# Altium PCB EDTENS.PcbDoc
Units mil, origin at the board's own origin, x right, y up, seen from the top; angles counter-clockwise.
Board outline 6000 x 4000 mil, 2 copper layers (Top Layer, Bottom Layer); 40 components, 18 nets, 96 pads, 0 vias.
Unrouted connection lines stored in the file: 78.
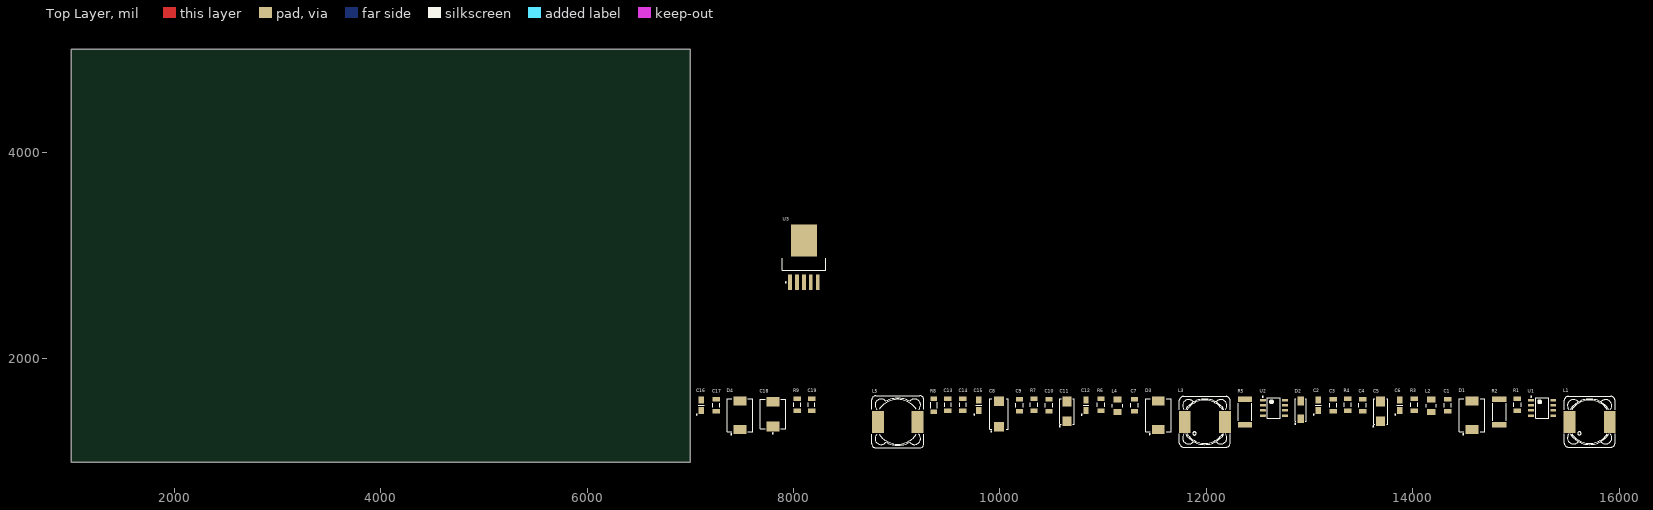
[diagram p0: Top Layer view]
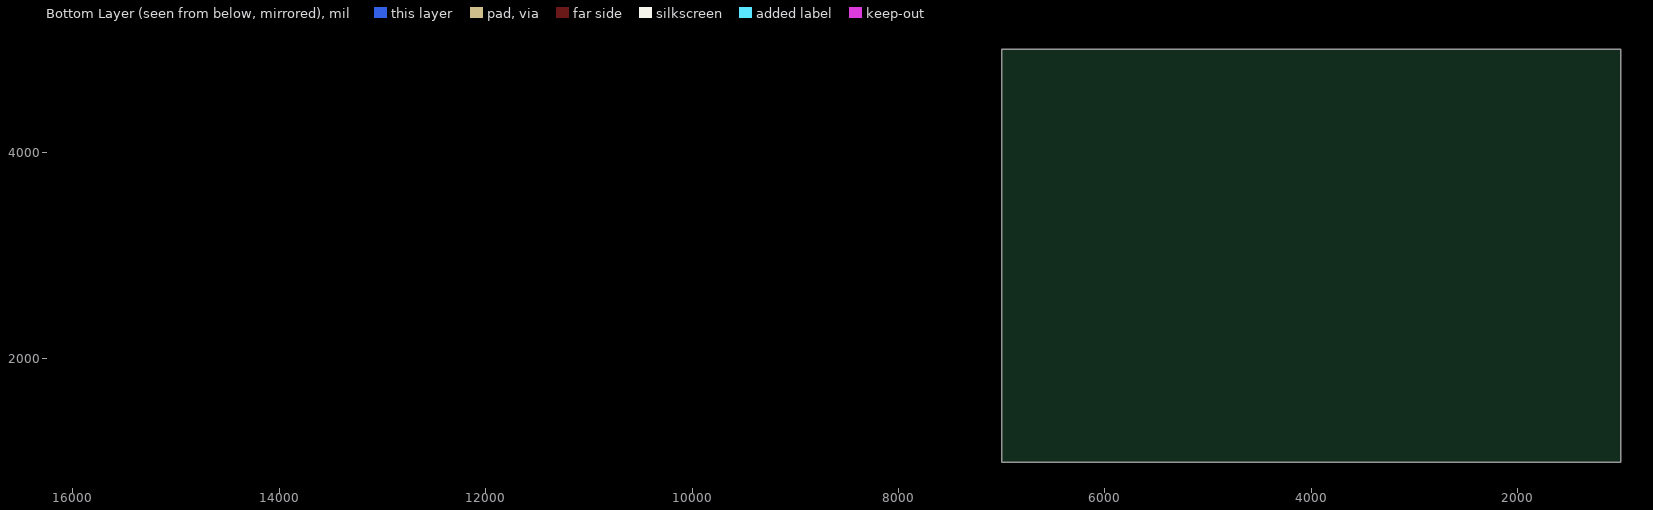
[diagram p1: Bottom Layer view, seen from below]

## Layer stack, top to bottom
Top Solder: solder mask 0.4, Solder Resist, Dk 3.5
Top Layer: signal copper 1.4
Dielectric 1: dielectric 12.6, FR-4, Dk 4.8
Bottom Layer: signal copper 1.4
Bottom Solder: solder mask 0.4, Solder Resist, Dk 3.5

## Board outline
1000,1000 7000,1000 7000,5000 1000,5000

## Design rules (kind name [scope] priority, off if disabled: settings)
Clearance [All] p1: gap=10 ignorepadtopadclearanceinfootprint=FALSE except(0: Arc-Hole Track-Hole SMDPad-Hole THPad-Hole Via-Hole Fill-Hole Poly-Hole Region-Hole Text-Hole)
PolygonConnect [All] p1: connectstyle=Relief reliefconductorwidth=10 reliefentries=4 polygonreliefangle="90 Angle" airgapwidth=10
RoomDefinition EDTENS [InComponentClass('EDTENS')] p1: confinementstyle=ConfineOut formatcopy=TRUE lockcomponents=FALSE outline 7045,990 15985,990 15985,1720 7045,1720
RoutingVias [All] p1: holewidth=28 width=50 viastyle="Through Hole" minholewidth=28 minwidth=50 maxholewidth=28 maxwidth=50
SolderMaskExpansion [All] p1: expansion=4 istentingtop=FALSE
Width [All] p1: maxlimit=10 minlimit=10 preferedwidth=10
30 further rules are at their usual default settings.

## Components (designator, comment, footprint, x,y, rotation, side; value= is the part's Value field where it differs from the comment)
C1 "1.5nF" CAPC3216X140N 14340,1550 r90 top
C2 "2.2uF" CAPMP3216X180N 13085,1550 r90 top
C3 "1uF" CAPC3216X140N 13230,1550 r90 top
C4 "330pF" CAPC3216X140N 13515,1550 r90 top
C5 "1uF" CAPMP6032X280N 13690,1490 r90 top
C6 "1uF" CAPMP3216X180N 13875,1550 r90 top
C7 "1.5nF" CAPC3216X140N 11305,1550 r90 top
C8 "220uF" CAPMP7343X430N 9990,1465 r90 top
C9 "1uF" CAPC3216X140N 10190,1550 r90 top
C10 "330pF" CAPC3216X140N 10475,1550 r90 top
C11 "1uF" CAPMP6032X280N 10650,1490 r90 top
C12 "1uF" CAPMP3216X180N 10835,1550 r90 top
C13 "100nF" CAPC3216X180N 9495,1555 r90 top
C14 "100nF" CAPC3216X180N 9640,1555 r90 top
C15 "2.2uF" CAPMP3216X180N 9795,1550 r90 top
C16 "2.2uF" CAPMP3216X180N 7105,1550 r90 top
C17 "1uF" CAPC3216X140N 7250,1550 r90 top
C18 "220uF" CAPMP7362X380N 7800,1465 r90 top
C19 "100nF" CAPC3216X180N 8175,1555 r90 top
D1 "SS34" DIOM7959X265N 14575,1455 r90 top
D2 "BZG03C39" DIOM5326X230N 12915,1505 r90 top
D3 "SS34" DIOM7959X265N 11535,1455 r90 top
D4 "SS34" DIOM7959X265N 7480,1455 r90 top
L1 "180uH" IND_WURTH_WE-PD_XXL 15715,1390 r0 top
L2 "1uH" INDM3225X210N 14180,1545 r90 top
L3 "100uH" IND_WURTH_WE-PD_XXL 11985,1390 r0 top
L4 "1uH" INDM3225X210N 11140,1545 r90 top
L5 "33uH" IND_BOURNS_PM127SH 9010,1390 r0 top
R1 "180" RESC3216X65N 15015,1555 r90 top
R2 "0R22" RESC6532X80N 14840,1485 r90 top
R3 "47k" RESC3216X65N 14015,1555 r90 top
R4 "2k2" RESC3216X65N 13370,1555 r90 top
R5 "0R24" RESC6532X80N 12375,1485 r90 top
R6 "953R" RESC3216X65N 10980,1555 r90 top
R7 "8K2" RESC3216X65N 10330,1555 r90 top value=8k2
R8 "50k" RES_SEI_HVC1206 9360,1550 r90 top
R9 "1k" RESC3216X65N 8035,1555 r90 top
U1 "MC33063AD" D0008A_N 15255,1525 r0 top
U2 "MC33063AD" D0008A_N 12655,1525 r0 top
U3 "LM2596SX-ADJ/NOPB" KTT0005B_L 8100,2985 r90 top

## Footprints (in the part's own frame and the unit in brackets; to place one, negate y for a bottom-side part, rotate by r counter-clockwise, add the part's x,y. Pads: shape width x height; smd on the part's side, far side on the other; paste and mask are expansions set on the pad)
CAPC3216X140N [mm] "Chip Capacitor, Body 3.2x1.6mm, IPC Medium Density"
  rect 1.15x1.8 smd: 1(-1.5,0) 2(1.5,0)
  silkscreen extent -0.5,-0.9 0.5,0.9, body extent -1.7,-0.9 1.7,0.9, height 1.4
CAPC3216X180N [mm] "Chip Capacitor, Body 3.2x1.6mm, IPC Medium Density"
  rect 1.15x1.8 smd: 1(-1.5,0) 2(1.5,0)
  silkscreen extent -0.55,-0.8 0.55,0.8, body extent -1.7,-0.9 1.7,0.9, height 1.8
CAPMP3216X180N [mm] "Capacitor, Polarized, Molded  Body 3.2x1.6mm, IPC Medium Density"
  rect 1.8x1.25 smd: 1(-1.3,0) 2(1.3,0)
  silkscreen extent -2.4,-0.7 0,1.25, body extent -1.7,-0.9 1.7,0.9, height 1.6
CAPMP6032X280N [mm] "Capacitor, Polarized, Molded  Body 6.0x3.2mm, IPC Medium Density"
  rect 2.35x2.25 smd: 1(-2.45,0) 2(2.45,0)
  silkscreen extent -3.8,-1.75 3.15,1.9, body extent -3.15,-1.75 3.15,1.75, height 2.8
CAPMP7343X430N [mm] "Capacitor, Polarized, Molded  Body 7.3x4.3mm, IPC Medium Density"
  rect 2.35x2.45 smd: 1(-3.1,0) 2(3.1,0)
  silkscreen extent -4.42,-2.3 3.8,2.3, body extent -3.8,-2.3 3.8,2.3, height 4.3
CAPMP7362X380N [mm] "Molded Capacitor, 2-Leads, Body 7.3x6.2mm, IPC Medium Density"
  rect 2.4x3.2 smd: 1(-3.05,0) 2(3.05,0)
  silkscreen extent -4.87,-3.1 3.65,3.1, body extent -3.75,-3.15 3.75,3.15, height 3.8
D0008A_N [mm] "SOIC, 8-Leads, Body 5x4mm, Pitch 1.27mm, IPC Medium Density"
  rrect17% 1.45x0.6 smd: 1(-2.725,1.905) 2(-2.725,0.635) 3(-2.725,-0.635) 4(-2.725,-1.905) 5(2.725,-1.905) 6(2.725,-0.635) 7(2.725,0.635) 8(2.725,1.905)
  silkscreen extent -2.85,-2.5 1.6,2.88, body extent -3,-2.45 3,2.45, height 1.63
DIOM5326X230N [mm] "DO-214-AC/SMA Molded Diode, Body 5.3x2.6mm, IPC Medium Density"
  rect 2.1x1.55 smd: 1(-2.2,0) 2(2.2,0)
  silkscreen extent -3.52,-1.4 2.75,1.45, body extent -2.75,-1.4 2.75,1.4, height 2.3
DIOM7959X265N [mm] "DO-214-AB/SMC Molded Diode, Body 7.9x5.9mm, IPC Medium Density"
  rect 2.2x3.15 smd: 1(-3.5,0) 2(3.5,0)
  silkscreen extent -4.82,-3.15 4.05,3.15, body extent -4.06,-3.11 4.07,3.11, height 2.65
IND_BOURNS_PM127SH [mm] "SMD Inductor Body Width 12.5mm Body Lenght 12.5mm Height 8mm"
  rect 2.9x5.4 smd: 1(-4.85,0) 2(4.85,0)
  silkscreen extent -6.4,-6.4 6.4,6.4, body extent -6.4,-6.4 6.4,6.4, height 8
IND_WURTH_WE-PD_XXL [mm] "Power-Choke Inductor, Body 12x12mm, WURTH WE-PD Serie Type XXL"
  rect 2.9x5.4 smd: 1(-4.95,0) 2(4.95,0)
  silkscreen extent -6.25,-6.25 6.25,6.25, body extent -6.25,-6.25 6.25,6.25, height 10
INDM3225X210N [mm] "Inductor, Molded Body; 3.20mm L X 2.50mm W, IPC Medium Density"
  rect 1.5x2.05 smd: 1(-1.5,0) 2(1.5,0)
  silkscreen extent -0.4,-1.25 0.4,1.25, body extent -1.7,-1.35 1.7,1.35, height 2.1
KTT0005B_L [mm] "DPAK, 5-Leads, Body 10.65x9.65mm, Pitch 1.7mm, IPC High Density"
  rrect11% 3.85x0.95 smd: 1(-6.2,3.4) 2(-6.2,1.7) 3(-6.2,0) 4(-6.2,-1.7) 5(-6.2,-3.4)
  rrect2% 7.9x6.4 smd: 6(4.15,0)
  silkscreen extent -6.32,-5.35 -0.2,5.35, body extent -3.2,-5.32 6.45,5.33, height 4.83
RES_SEI_HVC1206 [mm] "Chip Resistor, EIA 1206, Metric 3216, Body 3.2x1.6mm"
  rect 1x1.6 smd: 1(-1.6,0) 2(1.6,0)
  silkscreen extent -0.75,-0.8 0.75,0.8, body extent -1.6,-0.8 1.6,0.8, height 0.76
RESC3216X65N [mm] "Chip Resistor, EIA 1206, Metric 3216, Body 3.2x1.6mm, IPC Medium Density"
  rect 1.15x1.8 smd: 1(-1.45,0) 2(1.45,0)
  silkscreen extent -0.5,-0.9 0.5,0.9, body extent -1.67,-0.87 1.68,0.88, height 0.65
RESC6532X80N [mm] "Resistor, Chip; 6.5mm L X 3.25mm W X 0.80mm H, IPC Medium Density"
  rect 1.3x3.5 smd: 1(-3.15,0) 2(3.15,0)
  silkscreen extent -2.15,-1.65 2.15,1.65, body extent -3.25,-1.62 3.25,1.63, height 0.8

## Part data
C1 C7: library part CC1206_1.5NF_50V_5%_NP0, "Non-polarised capacitor", Case=1206, Manufacturer=GENERIC, Manufacturer1 ComponentHeight=1.25mm, Manufacturer1 Example=PHYCOMP, Manufacturer1 Part Number="2238 863 15152", Tolerance=±5%, Voltage=50V, Author="CERN DEM JLC", Component Type=Standard, CreateDate=12/3/2007, HelpURL=\\cern.ch\dfs\Applications\Altium\Datasheets\CC1206_NP0_PHYCOMP.pdf, LatestRevisionDate=12/3/2007, Manufacturer Part Number=CC1206_1.5NF_50V_5%_NP0, Mounted=Yes, Part Description="SMD Multilayer Chip Ceramic Capacitor", Part Number=CC1206_1.5NF_50V_5%_NP0, Pin Count=2, Sense=No, SMD=Yes, Socket=No, Status=Preferred, TC=C0G/NP0
C2 C15 C16: library part CTE3216-18_2.2UF_25V_10%, "Polarised capacitor", Case=A, Manufacturer=GENERIC, Manufacturer1 ComponentHeight=1.8mm, Manufacturer1 Example=AVX, Manufacturer1 Part Number=TAJA225K025R, Tolerance=±10%, Voltage=25V, Author="CERN DEM JLC", Component Type=Standard, CreateDate=5/26/2008, HelpURL=\\cern.ch\dfs\Applications\Altium\Datasheets\CTE_AVX_TAJ.pdf, LatestRevisionDate=5/26/2008, Manufacturer Part Number=CTE3216-18_2.2UF_25V_10%, Mounted=Yes, Part Description="Solid Tantalum Chip Capacitor", Part Number=CTE3216-18_2.2UF_25V_10%, Pin Count=2, Sense=No, SMD=Yes, Socket=No, Status=Preferred
C3 C9 C17: library part CC1206_1UF_100V_10%_X7R, "Non-polarised capacitor", Case=1206, Manufacturer=GENERIC, Manufacturer1 ComponentHeight=1.8mm, Manufacturer1 Example=KEMET, Manufacturer1 Part Number=C1206C105K1RAC, Tolerance=±10%, Voltage=100V, Author="CERN DEM BC", Component Type=Standard, CreateDate=1/24/2020, HelpURL=\\cern.ch\dfs\Applications\Altium\Datasheets\CC1206_X7R_KEMET_OPENMODE.pdf, LatestRevisionDate=1/24/2020, Manufacturer Part Number=CC1206_1UF_100V_10%_X7R, Mounted=Yes, Part Description="SMD Multilayer Chip Ceramic Capacitor", Part Number=CC1206_1UF_100V_10%_X7R, Pin Count=2, Sense=No, SMD=Yes, Socket=No, Status=Preferred, TC=X7R
C4 C10: library part CC1206_330PF_100V_10%_NP0, "Non-polarised capacitor", Case=1206, Manufacturer=GENERIC, Manufacturer1 ComponentHeight=0.94mm, Manufacturer1 Example=AVX, Manufacturer1 Part Number=12061A331KAT2A, Tolerance=±10%, Voltage=100V, Author="CERN DEM JLC", Component Type=Standard, CreateDate=8/24/2009, HelpURL=\\cern.ch\dfs\Applications\Altium\Datasheets\CC1206_NP0_AVX.pdf, LatestRevisionDate=8/24/2009, Manufacturer Part Number=CC1206_330PF_100V_10%_NP0, Mounted=Yes, Part Description="SMD Multilayer Chip Ceramic Capacitor", Part Number=CC1206_330PF_100V_10%_NP0, Pin Count=2, Sense=No, SMD=Yes, Socket=No, Status=Preferred, TC=C0G/NP0
C5 C11: library part CTE6032-28_1UF_50V_10%, "Polarised capacitor", Case=C, Manufacturer=GENERIC, Manufacturer1 ComponentHeight=2.8mm, Manufacturer1 Example=AVX, Manufacturer1 Part Number=TAJC105K050R, Tolerance=±10%, Voltage=50V, Author="CERN DEM JLC", Component Type=Standard, CreateDate=12/3/2007, HelpURL=\\cern.ch\dfs\Applications\Altium\Datasheets\CTE_AVX_TAJ.pdf, LatestRevisionDate=12/3/2007, Manufacturer Part Number=CTE6032-28_1UF_50V_10%, Mounted=Yes, Part Description="Solid Tantalum Chip Capacitor", Part Number=CTE6032-28_1UF_50V_10%, Pin Count=2, Sense=No, SMD=Yes, Socket=No, Status=Preferred
C6 C12: library part CTE3216-18_1UF_35V_10%, "Polarised capacitor", Case=A, Manufacturer=GENERIC, Manufacturer1 ComponentHeight=1.8mm, Manufacturer1 Example=AVX, Manufacturer1 Part Number=TAJA105K035R, Tolerance=±10%, Voltage=35V, Author="CERN DEM JLC", Component Type=Standard, CreateDate=12/3/2007, HelpURL=\\cern.ch\dfs\Applications\Altium\Datasheets\CTE_AVX_TAJ.pdf, LatestRevisionDate=12/3/2007, Manufacturer Part Number=CTE3216-18_1UF_35V_10%, Mounted=Yes, Part Description="Solid Tantalum Chip Capacitor", Part Number=CTE3216-18_1UF_35V_10%, Pin Count=2, Sense=No, SMD=Yes, Socket=No, Status=Preferred
C8: library part CTE7343-43_220UF_16V_10%, "Polarised capacitor", Case=E, Manufacturer=GENERIC, Manufacturer1 ComponentHeight=4.3mm, Manufacturer1 Example=AVX, Manufacturer1 Part Number=TAJE227K016R, Tolerance=±10%, Voltage=16V, Author="CERN DEM JLC", Component Type=Standard, CreateDate=12/3/2007, HelpURL=\\cern.ch\dfs\Applications\Altium\Datasheets\CTE_AVX_TAJ.pdf, LatestRevisionDate=12/3/2007, Manufacturer Part Number=CTE7343-43_220UF_16V_10%, Mounted=Yes, Part Description="Solid Tantalum Chip Capacitor", Part Number=CTE7343-43_220UF_16V_10%, Pin Count=2, Sense=No, SMD=Yes, Socket=No, Status=Preferred
C13 C14 C19: library part CC1206_100NF_50V_5%_C0G_TDK_CGA5L2C0G1H104J160AA, "Non-polarised capacitor", Case=1206, Manufacturer=TDK, Manufacturer Part Number=CGA5L2C0G1H104J160AA, Tolerance=±5%, Voltage=50V, Author="CERN DEM BC", Component Type=Standard, ComponentHeight=1.8mm, CreateDate=4/18/2016, HelpURL="\\cern.ch\dfs\Applications\Altium\Datasheets\CC1206_C0G_TDK_CGA(up to 50V).pdf", LatestRevisionDate=1/24/2018, Mounted=Yes, Part Description="SMD Multilayer Chip Ceramic Capacitor (Automotive Grade)", Part Number=CC1206_100NF_50V_5%_C0G_TDK_CGA5L2C0G1H104J160AA, Pin Count=2, Sense=No, SMD=Yes, Socket=No, Status="Not Recommended", TC=C0G/NP0
C18: library part CTE7362-38_220UF_16V_10%_LESR0075, "Polarised capacitor", Case=V, Manufacturer=GENERIC, Manufacturer1 ComponentHeight=3.8mm, Manufacturer1 Example=AVX, Manufacturer1 Part Number=TPSV227K016R0075, Tolerance=±10%, Voltage=16V, Author="CERN DEM JLC", Component Type=Standard, CreateDate=5/5/2008, HelpURL=\\cern.ch\dfs\Applications\Altium\Datasheets\CTE-LESR_AVX_TPS.pdf, LatestRevisionDate=7/6/2009, Manufacturer Part Number=CTE7362-38_220UF_16V_10%_LESR0075, Mounted=Yes, Part Description="Low ESR 0R075 Solid Tantalum Chip Capacitor", Part Number=CTE7362-38_220UF_16V_10%_LESR0075, Pin Count=2, Sense=No, SMD=Yes, Socket=No, Status=Preferred
D1 D3 D4: "Schottky Diode", Case=DO-214AB, Manufacturer="FAIRCHILD SEMICONDUCTOR", Power=3A, Voltage=40V, Author="CERN DEM JLC", Bonding=No, Component Type=Standard, ComponentHeight=2.65mm, CreateDate=8/23/2010, Device=SS34, HelpURL=\\cern.ch\dfs\Applications\Altium\Datasheets\SS34.pdf, LatestRevisionDate=11/8/2017, Manufacturer Part Number=SS34, Mounted=Yes, PackageDescription="DO-214-AB/SMC Molded Diode, Body 7.95x5.9mm, IPC Medium Density", Part Description="Surface Mount Schottky Barrier Rectifier", Part Number=SS34, Pin Count=2, PressFit=No, Sense=No, SMD=Yes, Socket=No
D2: "Zener Diode", Case=DO-214AC, Manufacturer="VISHAY SEMICONDUCTORS", Power=1.25W, Voltage=39V, Author="CERN DEM JLC", Bonding=No, Component Type=Standard, ComponentHeight=2.3mm, CreateDate=6/2/2008, Device=BZG03C39, HelpURL=\\cern.ch\dfs\Applications\Altium\Datasheets\BZG03C.pdf, LatestRevisionDate=6/2/2008, Manufacturer Part Number=BZG03C39, Mounted=Yes, PackageDescription="DO-214-AC/SMA Molded Diode, Body 5.3x2.6mm, IPC Medium Density", Part Description="Voltage Regulator Diode", Part Number=BZG03C39, Pin Count=2, PressFit=No, Sense=No, SMD=Yes, Socket=No
L1: library part IND_100UH_20%_WURTH_WE-PD_7447709101, "Inductor With Core", Manufacturer="WURTH ELEKTRONIK", Manufacturer Part Number=7447709101, Part Number=IND_180UH_20%_WURTH_WE-PD_7447709101, Power=2.5A, Resistance=0.1R, Tolerance=±20%, Author="Mehdi Amiri", Component Type=Standard, ComponentHeight=10mm, CreateDate=3/15/2012, HelpURL=\\cern.ch\dfs\Applications\Altium\Datasheets\IND_WURTH_WE-PD_7447709101.pdf, LatestRevisionDate=11/04/2023, Mounted=Yes, Part Description="Power-Choke Inductor (WE-PD Series)", Pin Count=2, Sense=No, SMD=Yes, Socket=No
L2 L4: library part IND1210_1UH_10%_EPCOS_B82422A, "Inductor With Core", Case=1210, Manufacturer=EPCOS, Manufacturer Part Number=B82422A1102K100, Power=380mA, Resistance=0.34R, Tolerance=±10%, Author="CERN DEM JLC", Component Type=Standard, ComponentHeight=2.1mm, CreateDate=11/30/2011, HelpURL=\\cern.ch\dfs\Applications\Altium\Datasheets\IND1210_EPCOS_B82422A.pdf, LatestRevisionDate=11/30/2011, Mounted=Yes, Part Description="SMT Inductor SIMID Series", Part Number=IND1210_1UH_10%_EPCOS_B82422A, Pin Count=2, Sense=No, SMD=Yes, Socket=No
L3: library part IND_100UH_20%_WURTH_WE-PD_7447709101, "Inductor With Core", Manufacturer="WURTH ELEKTRONIK", Manufacturer Part Number=7447709101, Power=2.5A, Resistance=0.1R, Tolerance=±20%, Author="CERN DEM JLC", Component Type=Standard, ComponentHeight=10mm, CreateDate=3/15/2012, HelpURL=\\cern.ch\dfs\Applications\Altium\Datasheets\IND_WURTH_WE-PD_7447709101.pdf, LatestRevisionDate=3/15/2012, Mounted=Yes, Part Description="Power-Choke Inductor (WE-PD Series)", Part Number=IND_100UH_20%_WURTH_WE-PD_7447709101, Pin Count=2, Sense=No, SMD=Yes, Socket=No
L5: library part IND_33UH_20%_BOURNS_PM127SH, "Inductor", Manufacturer=BOURNS, Manufacturer Part Number=PM127SH-330M-RC, Power=3.5A, Resistance=0.057R, Tolerance=±20%, Author="CERN DEM JLC", Component Type=Standard, ComponentHeight=8mm, CreateDate=11/18/2009, HelpURL=\\cern.ch\dfs\Applications\Altium\Datasheets\IND_BOURNS_PM127SH.pdf, LatestRevisionDate=11/18/2009, Mounted=Yes, Part Description="Shielded SMD Power Inductor PM127SH Series", Part Number=IND_33UH_20%_BOURNS_PM127SH, Pin Count=2, Sense=No, SMD=Yes, Socket=No
R1: library part R1206_180R_0.1%_0.25W_25PPM, "Resistor - 0.1%", Case=1206, Manufacturer=GENERIC, Manufacturer1 ComponentHeight=0.70mm, Manufacturer1 Example=KOA, Manufacturer1 Part Number=RN73H2BTTD1800B25, Power=0.25W, Tolerance=±0.1%, Author="CERN DEM JLC", Component Type=Standard, CreateDate=12/3/2007, HelpURL=\\cern.ch\dfs\Applications\Altium\Datasheets\R1206_KOA_RN73H.pdf, LatestRevisionDate=3/13/2008, Manufacturer Part Number=R1206_180R_0.1%_0.25W_25PPM, Mounted=Yes, Part Description="Thin Film Chip Resistor", Part Number=R1206_180R_0.1%_0.25W_25PPM, Pin Count=2, PressFit=No, Sense=No, SMD=Yes, Socket=No, Status="Not Recommended", TC=±25ppm/°C
R2: library part R2512_0R5_1%_1.5W_100PPM, "Resistor - 1%", Case=2512, Manufacturer=GENERIC, Manufacturer1 ComponentHeight=0.8mm, Manufacturer1 Example=WELWYN, Manufacturer1 Part Number=LR2512-R22FW, Manufacturer Part Number=R2512_0R22_1%_1.5W_100PPM, Power=1.5W, Tolerance=±1%, Author="Mehdi Amiri", Component Type=Standard, CreateDate=8/23/2010, HelpURL=\\cern.ch\dfs\Applications\Altium\Datasheets\R2512_WELWYN_LR.pdf, LatestRevisionDate=8/23/2010, Mounted=Yes, Part Description="Thick Film Chip Resistor", Part Number=R2512_0R22_1%_1.5W_100PPM, Pin Count=2, PressFit=No, Sense=No, SMD=Yes, Socket=No, Status=None, TC=±100ppm/°C
R3: library part R1206_47K_0.1%_0.25W_25PPM, "Resistor - 0.1%", Case=1206, Manufacturer=GENERIC, Manufacturer1 ComponentHeight=0.70mm, Manufacturer1 Example=KOA, Manufacturer1 Part Number=RN73H2BTTD4702B25, Power=0.25W, Tolerance=±0.1%, Author="CERN DEM JLC", Component Type=Standard, CreateDate=12/3/2007, HelpURL=\\cern.ch\dfs\Applications\Altium\Datasheets\R1206_KOA_RN73H.pdf, LatestRevisionDate=3/13/2008, Manufacturer Part Number=R1206_47K_0.1%_0.25W_25PPM, Mounted=Yes, Part Description="Thin Film Chip Resistor", Part Number=R1206_47K_0.1%_0.25W_25PPM, Pin Count=2, PressFit=No, Sense=No, SMD=Yes, Socket=No, Status="Not Recommended", TC=±25ppm/°C
R4: library part R1206_2K2_1%_0.25W_100PPM, "Resistor - 1%", Case=1206, Manufacturer=GENERIC, Manufacturer1 ComponentHeight=0.65mm, Manufacturer1 Example="NIC COMPONENT", Manufacturer1 Part Number=NRC12F2201TRF, Power=0.25W, Tolerance=±1%, Author="CERN DEM JLC", Component Type=Standard, CreateDate=12/3/2007, HelpURL=\\cern.ch\dfs\Applications\Altium\Datasheets\R1206_NIC_NRC.pdf, LatestRevisionDate=3/13/2008, Manufacturer Part Number=R1206_2K2_1%_0.25W_100PPM, Mounted=Yes, Part Description="General Purpose Thick Film Chip Resistor", Part Number=R1206_2K2_1%_0.25W_100PPM, Pin Count=2, PressFit=No, Sense=No, SMD=Yes, Socket=No, Status=Preferred, TC=±100ppm/°C
R5: library part R2512_0R5_1%_1.5W_100PPM, "Resistor - 1%", Case=2512, Manufacturer=GENERIC, Manufacturer1 ComponentHeight=0.8mm, Manufacturer1 Example=WELWYN, Manufacturer1 Part Number=LR2512-R24FW, Manufacturer Part Number=R2512_0R24_1%_1.5W_100PPM, Power=1.5W, Tolerance=±1%, Author="Mehdi Amiri", Component Type=Standard, CreateDate=8/23/2010, HelpURL=\\cern.ch\dfs\Applications\Altium\Datasheets\R2512_WELWYN_LR.pdf, LatestRevisionDate=8/23/2010, Mounted=Yes, Part Description="Thick Film Chip Resistor", Part Number=R2512_0R24_1%_1.5W_100PPM, Pin Count=2, PressFit=No, Sense=No, SMD=Yes, Socket=No, Status=None, TC=±100ppm/°C
R6: library part R1206_1K_0.1%_0.25W_25PPM, "Resistor - 0.1%", Case=1206, Manufacturer=GENERIC, Manufacturer1 ComponentHeight=0.70mm, Manufacturer1 Example=KOA, Manufacturer1 Part Number=RN73H2BTTD953B25, Manufacturer Part Number=R1206_953R_0.1%_0.25W_25PPM, Power=0.25W, Tolerance=±0.1%, Author="Mehdi Amiri", Component Type=Standard, CreateDate=12/3/2007, HelpURL=\\cern.ch\dfs\Applications\Altium\Datasheets\R1206_KOA_RN73H.pdf, LatestRevisionDate=11/1/2011, Mounted=Yes, Part Description="Thin Film Chip Resistor", Part Number=R1206_953R_0.1%_0.25W_25PPM, Pin Count=2, PressFit=No, Sense=No, SMD=Yes, Socket=No, Status="Not Recommended", TC=±25ppm/°C
R7: library part R1206_8K2_0.1%_0.25W_25PPM, "Resistor - 0.1%", Case=1206, Manufacturer=GENERIC, Manufacturer1 ComponentHeight=0.70mm, Manufacturer1 Example=KOA, Manufacturer1 Part Number=RN73H2BTTD8201B25, Power=0.25W, Tolerance=±0.1%, Author="CERN DEM JLC", Component Type=Standard, CreateDate=12/3/2007, HelpURL=\\cern.ch\dfs\Applications\Altium\Datasheets\R1206_KOA_RN73H.pdf, LatestRevisionDate=3/13/2008, Manufacturer Part Number=R1206_8K2_0.1%_0.25W_25PPM, Mounted=Yes, Part Description="Thin Film Chip Resistor", Part Number=R1206_8K2_0.1%_0.25W_25PPM, Pin Count=2, PressFit=No, Sense=No, SMD=Yes, Socket=No, Status="Not Recommended", TC=±25ppm/°C
R8: library part R1206_50K_1%_0.33W_100PPM_SEI_HVC, "Resistor - 0.1%", Case=1206, Manufacturer="SEI (STACKPOLE ELECTRONICS INC.)", Manufacturer Part Number=HVCB1206FDD50K0, Power=0.33W, Tolerance=±1%, Voltage=1500V, Author="CERN DEM JLC", Component Type=Standard, ComponentHeight=0.76mm, CreateDate=1/18/2018, HelpURL=\\cern.ch\dfs\Applications\Altium\Datasheets\R1206_SEI_HVC.pdf, LatestRevisionDate=1/18/2018, Mounted=Yes, Part Description="High Voltage Thick Film Chip Resistor", Part Number=R1206_50K_1%_0.33W_100PPM_SEI_HVC, Pin Count=2, PressFit=No, Sense=No, SMD=Yes, Socket=No, Status=None, TC=±100ppm/°C
R9: library part R1206_1K_0.1%_0.25W_25PPM, "Resistor - 0.1%", Case=1206, Manufacturer=GENERIC, Manufacturer1 ComponentHeight=0.70mm, Manufacturer1 Example=KOA, Manufacturer1 Part Number=RN73H2BTTD1001B25, Power=0.25W, Tolerance=±0.1%, Author="CERN DEM JLC", Component Type=Standard, CreateDate=12/3/2007, HelpURL=\\cern.ch\dfs\Applications\Altium\Datasheets\R1206_KOA_RN73H.pdf, LatestRevisionDate=11/1/2011, Manufacturer Part Number=R1206_1K_0.1%_0.25W_25PPM, Mounted=Yes, Part Description="Thin Film Chip Resistor", Part Number=R1206_1K_0.1%_0.25W_25PPM, Pin Count=2, PressFit=No, Sense=No, SMD=Yes, Socket=No, Status="Not Recommended", TC=±25ppm/°C
U1 U2: library part CMP-0323-00189-3, "Inverting Buck-Boost Regulator with 3 to 40 V Input and 1.25 to 40 V Output, -40 to 85 degC, 8-Pin SOIC (D), Green (RoHS & no Sb/Br)", Manufacturer="Texas Instruments", Rating=Catalog, Switch Current Limit(Typ)(A)=1.5, Code_JEDEC=MS-012AA, ComponentLink1Description=Datasheet, ComponentLink1URL=http://www.ti.com/general/docs/lit/getliterature.tsp?genericPartNumber=MC33063A&fileType=pdf, ComponentLink2Description="Package Specification", ComponentLink2URL=http://www.ti.com/litv/pdf/msoi002j, ComponentLink3Description="URL Link1", ComponentLink3URL="Samples URL:http://www.ti.com/product/mc33063a#samples", DatasheetVersion=SLLS636M, Eco-Plan="Green (RoHS & no Sb/Br)", Iout(Max)(A)=0.75, Mounting Technology="Surface Mount", PackageDescription="8-Pin Plastic Small Outline Integrated Circuit, 4.9 x 3.9 mm, Pitch 1.27 mm Pitch", PackageReference=D0008A, PackageVersion="revM, Jun-2011", PartNumber=MC33063AD, Regulated Outputs(#)=1, SubFamily="Step-Down Regulator", Topology="Inverting Buck-Boost", Vin(Max)(V)=40, Vin(Min)(V)=3, Vout(Max)(V)=40, Vout(Min)(V)=1.25
U3: library part CMP-2000-06545-1, "Simple Switcher(R) Power Converter 150 kHz Step-Down Voltage Regulator, 3 A, 4.5 to 40 V, -40 to 125 degC, 5-Pin TO-263 (KTT), Green (RoHS & no Sb/Br), Tape and Reel", Manufacturer="Texas Instruments", Operating Temperature Max=125°C, Operating Temperature Min=-40°C, Operating Temperature Range=-40°Cto+125°C, Output Current=3A, Output Voltage=37V, Package Description="5-Pin Plastic Flange Mount, Body 10.16 x 8.925 mm, Pitch 1.7 mm", Package Reference=KTT5, Package Version="4200577-4/G, 01/2013", PartNumber=LM2596, Primary Input Voltage=40V, Voltage Regulator Case Style=TO-263, Datasheet URL=http://www.ti.com/lit/ds/symlink/lm2596.pdf, Datasheet Version="Rev. C, 04/2013", Manufacturer URL=http://www.ti.com/, Mounting Technology=SurfaceMount, MSL=MSL3-168hours, No. of Outputs=1, No. of Pins=5, Number of Outputs=1, Package URL=http://www.ti.com/litv/pdf/mpsf007e, SVHC=NoSVHC(19-Dec-2012)

## Nets (pads, with @x,y where several pads share a name; then routed paths per layer and width w, separated by ;. In a path a pad name is that pad's centre, name@x,y a point inside that pad or via, vN(x,y) a via of type N, cw(c..) or ccw(c..) an arc to the next point about the centre after c; other vN are vias at no path point)
5V1_VP: C8.1 C9.2 C13.2 C14.2 C15.1 C18.1 L5.2 R5.1 R8.2 U2.6
12V1_VN: C12.2 D2.2 L4.2
12V1_VP: C2.1 C3.2 C16.1 C17.2 R2.1 U1.6 U3.1
28VP: C6.1 D2.1 L2.2
GND: C1.1 C2.2 C3.1 C4.1 C5.2 C6.2 C8.2 C9.1 C10.1 C11.1 C12.1 C14.1 C15.2 C16.2 C17.1 C18.2 C19.1 D4.2 L3.1 R4.1 R7.1 R9.1 U1.2 U1.4 U3.3 U3.5 U3.6
NetC1_2: C1.2 U1.3
NetC4_2: C4.2 C5.1 D1.1 L2.1 R3.2
NetC7_1: C7.1 C10.2 C11.2 D3.2 L4.1 R6.2 U2.4
NetC7_2: C7.2 U2.3
NetC13_1: C13.1 C19.2 R8.1 R9.2 U3.4
NetD1_2: D1.2 L1.2 U1.1
NetD3_1: D3.1 L3.2 U2.2
NetD4_1: D4.1 L5.1 U3.2
NetL1_1: L1.1 R1.1 R2.2 U1.7
NetR1_2: R1.2 U1.8
NetR3_1: R3.1 R4.2 U1.5
NetR5_2: R5.2 U2.1 U2.7 U2.8
NetR6_1: R6.1 R7.2 U2.5